# EAGLE board Precharger (EAGLE 7.7.0)
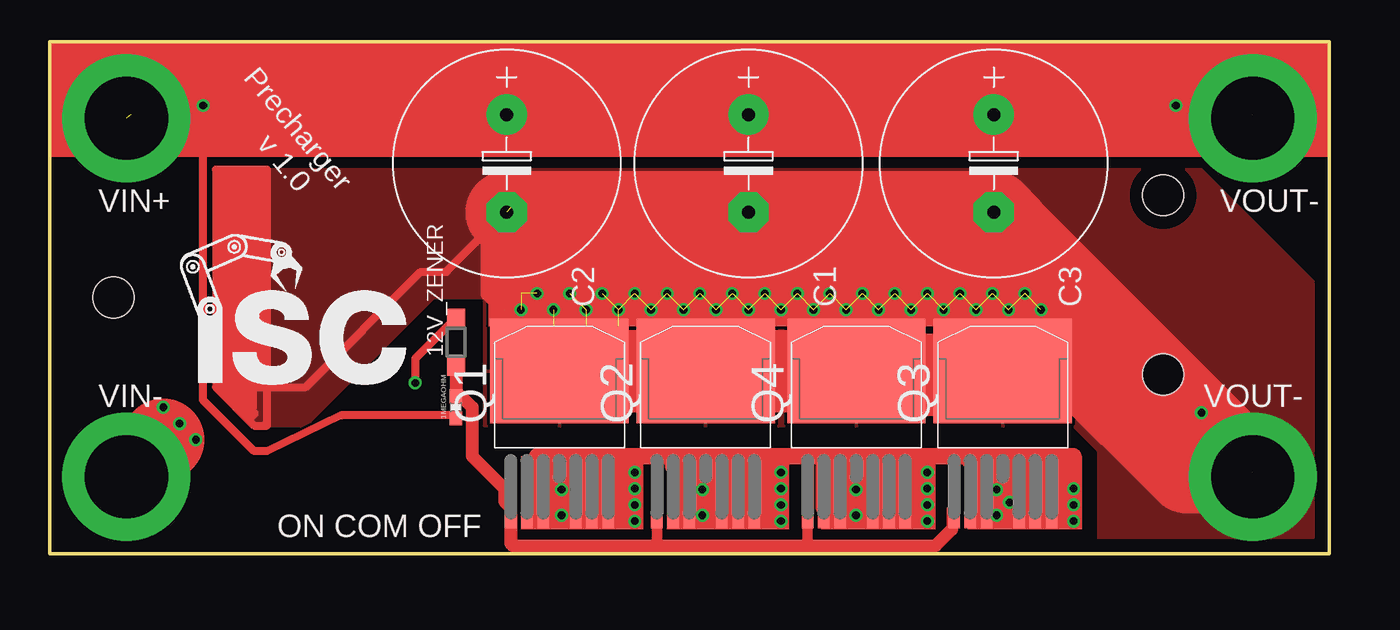
[diagram p0: board, top side]
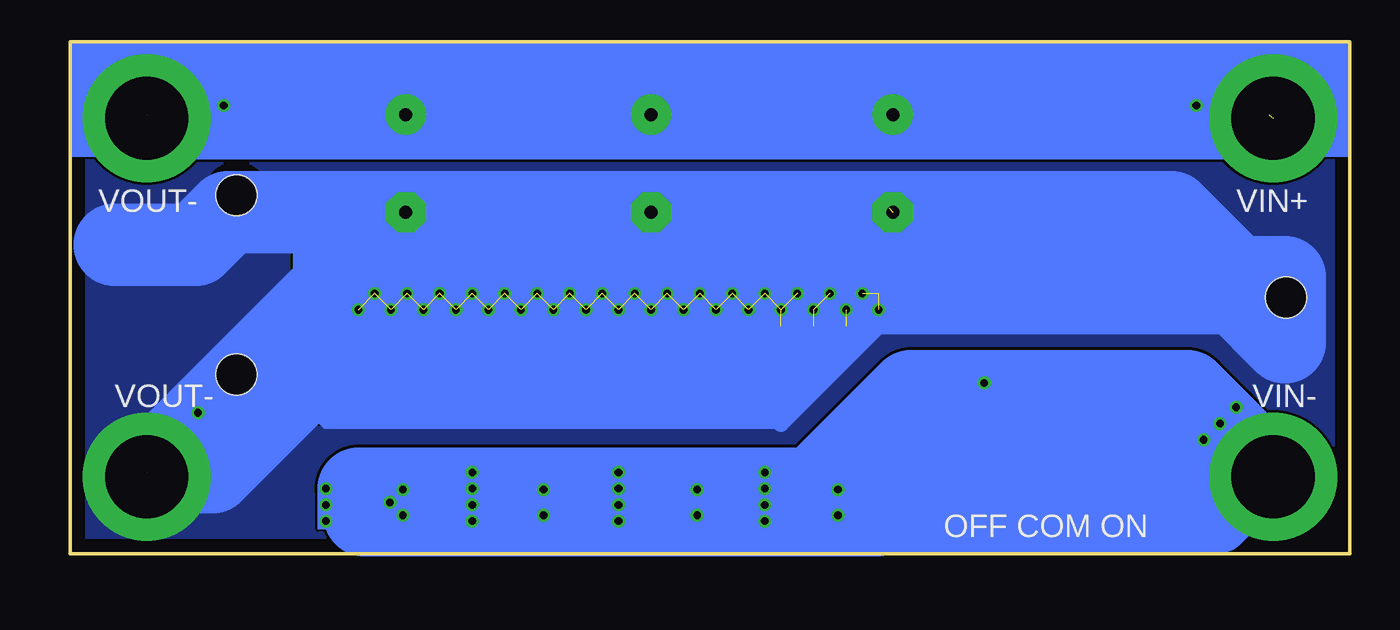
[diagram p1: board, bottom side, seen from below]

Size 100 x 40 mm. Coordinates in mm from the lower left corner, seen from the top.
Outline: 0,0 0,40 100,40 100,0 0,0
Copper layers (1*16): Top 0.035mm / dielectric 1.5mm / Bottom 0.035mm
Design rules "default": minimum track width 10mil, minimum drill 24mil, track to track 8mil, track to pad 8mil, pad to pad 8mil, via to via 8mil, smd to smd 8mil, copper to edge 40mil, drill to drill 8mil, minimum pad ring 10mil, minimum via ring 8mil, stop-mask expansion 4mil, vias tented up to drill 0mil, thermal gap 10mil
Holes 3.2 mm at 5,20 87,28 87,14

## Footprints (pad centres in the part's own frame; a part is rotated, then mirrored left to right if it is on the bottom)
0603-RES = smd 1.1 x 1: 1 -0.85,0; 2 0.85,0
SOD123 = smd 1.4 x 1.4: A 1.9,0; C -1.9,0
E7,5-18 = drill 1.016 pad 3.15: + -3.81,0 | drill 1.016 pad 3.15 octagon: - 3.81,0
D2PAK-7 = smd 10.8 x 8.15: D 0,4.1 | smd 0.9 x 3.2: G -3.81,-6.56; S1 -2.54,-6.56; S2 -1.27,-6.56; S3 1.27,-6.56; S4 2.54,-6.56; S5 3.81,-6.56

## Placement (x,y rotation side)
1MEGAOHM  [0603-RES]  31.75,11.43 90 top
12V_ZENER  [SOD123]  31.75,16.51 90 top
C1  [E7,5-18]  54.61,30.48 270 top
C2  [E7,5-18]  35.72,30.48 270 top
C3  [E7,5-18]  73.77,30.48 270 top
Q1  NMOSFET-D2PAK-7  [D2PAK-7]  39.83,10.16 0 top
Q2  NMOSFET-D2PAK-7  [D2PAK-7]  51.26,10.16 0 top
Q3  NMOSFET-D2PAK-7  [D2PAK-7]  74.47,10.16 0 top
Q4  NMOSFET-D2PAK-7  [D2PAK-7]  63.04,10.16 0 top

## Library data of the parts
1MEGAOHM = SparkFun-Passives
12V_ZENER = sym
C1-C3 = adafruit
Q1-Q4 = D2PAK-7

## Nets
DRAIN: C1.- C2.- C3.- Q1.D Q2.D Q3.D Q4.D
GATE: 1MEGAOHM.2 12V_ZENER.C Q1.G Q2.G Q3.G Q4.G
IN: C1.+ C2.+ C3.+
S$5: 12V_ZENER.A
SOURCE: Q1.S1 Q1.S2 Q1.S3 Q1.S4 Q1.S5 Q2.S1 Q2.S2 Q2.S3 Q2.S4 Q2.S5 Q3.S1 Q3.S2 Q3.S3 Q3.S4 Q3.S5 Q4.S1 Q4.S2 Q4.S3 Q4.S4 Q4.S5

## Tracks (layer width: path | path; a pad name or v marks a point on that pad's centre or on a via)
DRAIN  (via drill 0.6 pad 0.41, 6.5 pad 10)  (36 unrouted)
  Top 0.61: 13,13 16,10 17,10 17,30 13,30 13,13 | 13,13 14,13 | 14,13 20,13 29,22 31,22 36,27 | 14,13 16,11 16,10.92 15.88,10.79 13.97,12.7 15.24,12.7 | 15.24,12.7 15.88,12.7 15.88,12.06 | 15.88,12.06 15.88,11.43 15.24,12.06 15.24,12.7 | 15.24,12.7 15.88,12.06
  Top 1.27: 34.29,24.13 34.29,20.32 35.56,19.05
  Top 6.452: Q1.D Q2.D Q4.D 63.21,14.26 63.5,13.97 74.18,13.97 Q3.D 75.45,15.24 80.01,15.24 88.9,6.35 93.98,6.35 74.93,25.4 74.93,25.51 C3.- C1.- C2.-
  Bottom 0.813: v36.83,19.05 36.83,17.78 44.45,10.16 80.01,10.16 81.28,11.43
  Bottom 1.27: 35.56,19.05 44.45,10.16 44.45,11.43 | 44.45,12.7 44.45,13.97 | 44.45,15.24 44.45,16.51 | 44.45,16.51 44.45,17.78 43.18,17.78 | 41.91,17.78 40.64,17.78 | 39.37,17.78 38.1,17.78 44.45,11.43 | 44.45,11.43 44.45,12.7 | 44.45,12.7 39.37,17.78 | 39.37,17.78 40.64,17.78 | 40.64,17.78 44.45,13.97 | 44.45,13.97 44.45,15.24 | 44.45,15.24 41.91,17.78 | 41.91,17.78 43.18,17.78 | 43.18,17.78 44.45,16.51
  Bottom 6.452: 36.83,20.32 8.89,20.32 5.08,16.51 5.08,21.59 8.89,21.59 13.97,26.67 87.63,26.67 90.17,24.13 96.52,24.13 | 73.66,26.67 93.98,6.35 88.9,6.35 81.28,13.97
  other vias: 49.53,19.05 52.07,19.05 53.34,20.32 54.61,19.05 48.26,20.32 46.99,19.05 45.72,20.32 44.45,19.05 43.18,20.32 41.91,19.05 40.64,20.32 39.37,19.05 38.1,20.32 68.58,20.32 71.12,20.32 72.39,19.05 69.85,19.05 67.31,19.05 66.04,20.32 64.77,19.05 63.5,20.32 62.23,19.05 60.96,20.32 59.69,19.05 58.42,20.32 57.15,19.05 55.88,20.32 50.8,20.32 74.93,19.05 73.66,20.32 76.2,20.32 77.47,19.05 94,6
  pour Bottom: 0,40 100,40 100,0 0,0
  pour Top: 16,30 90,30 100,20 100,0 82,0 82,8 80,10 34,10 34,20 30,20 20,10 16,10
GATE
  Top 0.813: 70.48,1.91 70.48,3.42 Q3.G | Q4.G 59.23,0.81 59.05,0.64 | Q2.G 47.45,0.81 47.62,0.64
  Top 1.016: 12V_ZENER.C 1MEGAOHM.2 32.17,12.28 33.02,11.43 33.02,7.62 35.56,5.08 35.56,4.06 Q1.G 36.02,0.81 36.2,0.64 47.62,0.64 59.05,0.64 69.22,0.64 70.48,1.91
IN  (via drill 6.5 pad 10)  (2 unrouted)
  Top 1.27: v6,34 35.43,34 C2.+
  Top 6.452: C1.+ C3.+ 93.98,34.29 | 95.25,34.29 6.35,34.29
  Bottom 6.452: v6,34 93.69,34 93.98,34.29
N$1  (via drill 0.6 pad 0.41)
  Bottom 6.452: 6.35,6.35 v10.16,10.16 12.7,12.7 34.29,12.7 41.91,5.08 v45.72,5.08 v57.15,5.08 v68.58,5.08 77.47,5.08
N$3  (via drill 0.6 pad 0.41)
  other vias: 80.01,5.08
N$4  (via drill 0.6 pad 0.41)
  other vias: 80.01,2.54
N$6  (via drill 0.6 pad 0.41)
  other vias: 68.58,6.35
N$8  (via drill 0.6, 6.5 pad 10)
  Bottom 3.81: 37,3 36,2 33,2 | 33,2 15,2 | 15,2 10,2 v6,6 | 11,3 11,8 13,10 13,9 | 13,9 13,4 15,2 | 13,9 16,12 | 35,3 35,4 | 35,4 35,9 33,11 | 13,11 33,11 | 33,11 35,11 | 33,2 35,4
  Bottom 6.452: 77,3 v74,3 v63,3 v51,3 v40,3 37,3
N$10  (via drill 6.5 pad 10)
  other vias: 94,34
N$11  (via drill 0.6 pad 0.41)
  other vias: 68.58,2.54
N$12  (via drill 0.6 pad 0.41)
  other vias: 57.15,6.35
N$13  (via drill 0.6 pad 0.41)
  Bottom 1.27: v45.72,3.81 v57.15,3.81 v68.58,3.81 v80.01,3.81
N$14  (via drill 0.6 pad 0.41)
  other vias: 57.15,2.54
N$15  (via drill 0.6 pad 0.41)
  other vias: 45.72,6.35
N$17  (via drill 0.6 pad 0.41)
  other vias: 45.72,2.54
S$1  (via drill 0.6 pad 0.41)
  other vias: 8.89,11.43
S$2  (via drill 0.6 pad 0.41)
  other vias: 11.43,8.89
S$3
  Top 6.452: 6.35,6.35 8.89,8.89
S$4
  Bottom 3.81: 15,7 17,9 32,9 34,7 34,6 33,5 16,5 | 16,5 15,4 | 16,5 18,7 31,7
S$5
  Top 1.27: 12V_ZENER.A
S$6  (via drill 0.6)
  Top 0.61: 31.75,18.41 28.57,15.24 v28.57,13.34
S$7  (via drill 0.6)
  Top 0.61: 31.75,10.79 22.8,10.79 17,8 16,8 12,12 v12,35
S$9  (via drill 0.6)
  other vias: 40,5
S$10  (via drill 0.6)
  other vias: 51,5
S$11  (via drill 0.6)
  other vias: 63,5
S$12  (via drill 0.6)
  other vias: 74,5
S$13  (via drill 0.6)
  other vias: 75,4
S$15  (via drill 0.6)
  other vias: 88,35
S$16  (via drill 0.6)
  other vias: 90,11
SOURCE
  Top 0.61: Q1.S1 Q1.S2 | Q3.S1 71.93,7.16 | Q2.S1 48.72,6.81
  Top 1.27: 45.72,3.81 45.51,3.6 Q1.S5 Q1.S4 Q1.S3 Q1.S2 39.37,4.41 39.37,5.08 38.1,6.35 38.1,7.62 49.53,7.62 | Q3.S5 79.8,3.6 80.01,3.81 80.01,7.62 76.2,7.62 | 76.2,7.62 73.66,7.62 | 73.66,7.62 72.39,7.62 | 72.39,7.62 66.04,7.62 | 66.04,7.62 64.77,7.62 | 64.77,7.62 60.96,7.62 | 60.96,7.62 54.61,7.62 | 54.61,7.62 53.34,7.62 | 53.34,7.62 52.07,7.62 | 52.07,7.62 49.53,7.62 | Q2.S2 49.99,7.16 49.53,7.62 | 48.72,6.81 49.53,7.62 | Q2.S3 52.53,7.16 52.07,7.62 | Q2.S4 53.8,7.16 53.34,7.62 | Q2.S5 55.07,7.16 54.61,7.62 | Q4.S1 60.5,7.16 60.96,7.62 | Q4.S2 61.77,6.81 60.96,7.62 | Q4.S3 64.31,7.16 64.77,7.62 | Q4.S4 65.58,6.81 64.77,7.62 | Q4.S5 66.85,6.81 66.04,7.62 | 71.93,7.16 72.39,7.62 | Q3.S2 73.2,7.16 73.66,7.62 | Q3.S3 75.74,7.16 76.2,7.62 | Q3.S4 77.01,6.81 76.2,7.62
(copper drawn outside any net)
  shapes: Bottom area x4, Top area x7

## Text on the board
tNames: Precharger / v 1.0 | VIN+ | VOUT- | VIN- | VOUT- | ON COM OFF
bNames: VIN+ | VOUT- | VIN- | VOUT- | OFF COM ON